# Altium PCB MM6108IQ MotherBoard.PcbDoc
Units mil, origin at the board's own origin, x right, y up, seen from the top; angles counter-clockwise.
Board outline 6000 x 4000 mil, 2 copper layers (Top Layer, Bottom Layer); 73 components, 61 nets, 213 pads, 0 vias.
Unrouted connection lines stored in the file: 137.
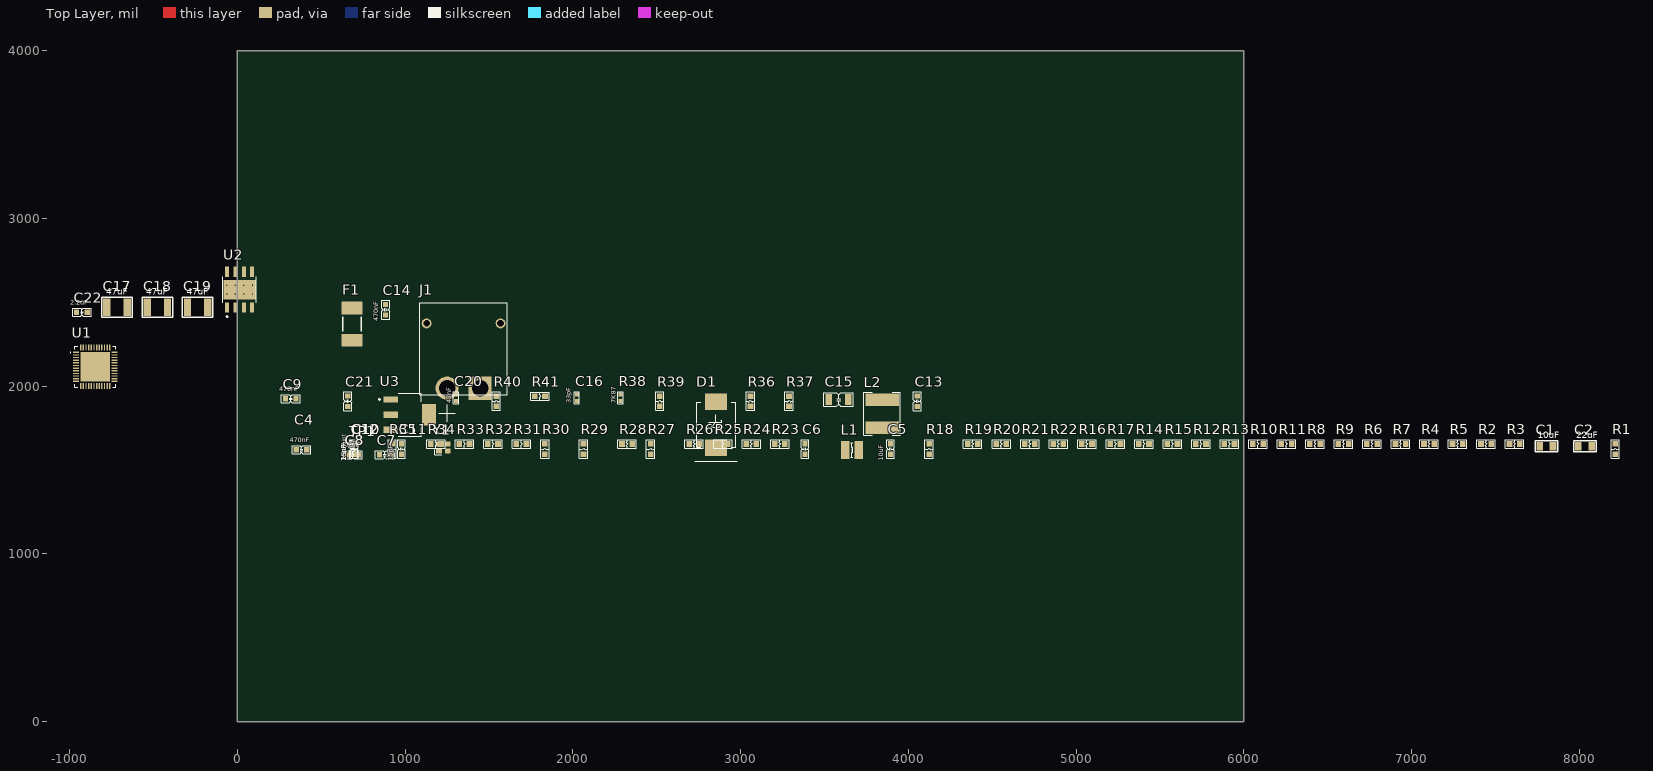
[diagram p0: Top Layer view]
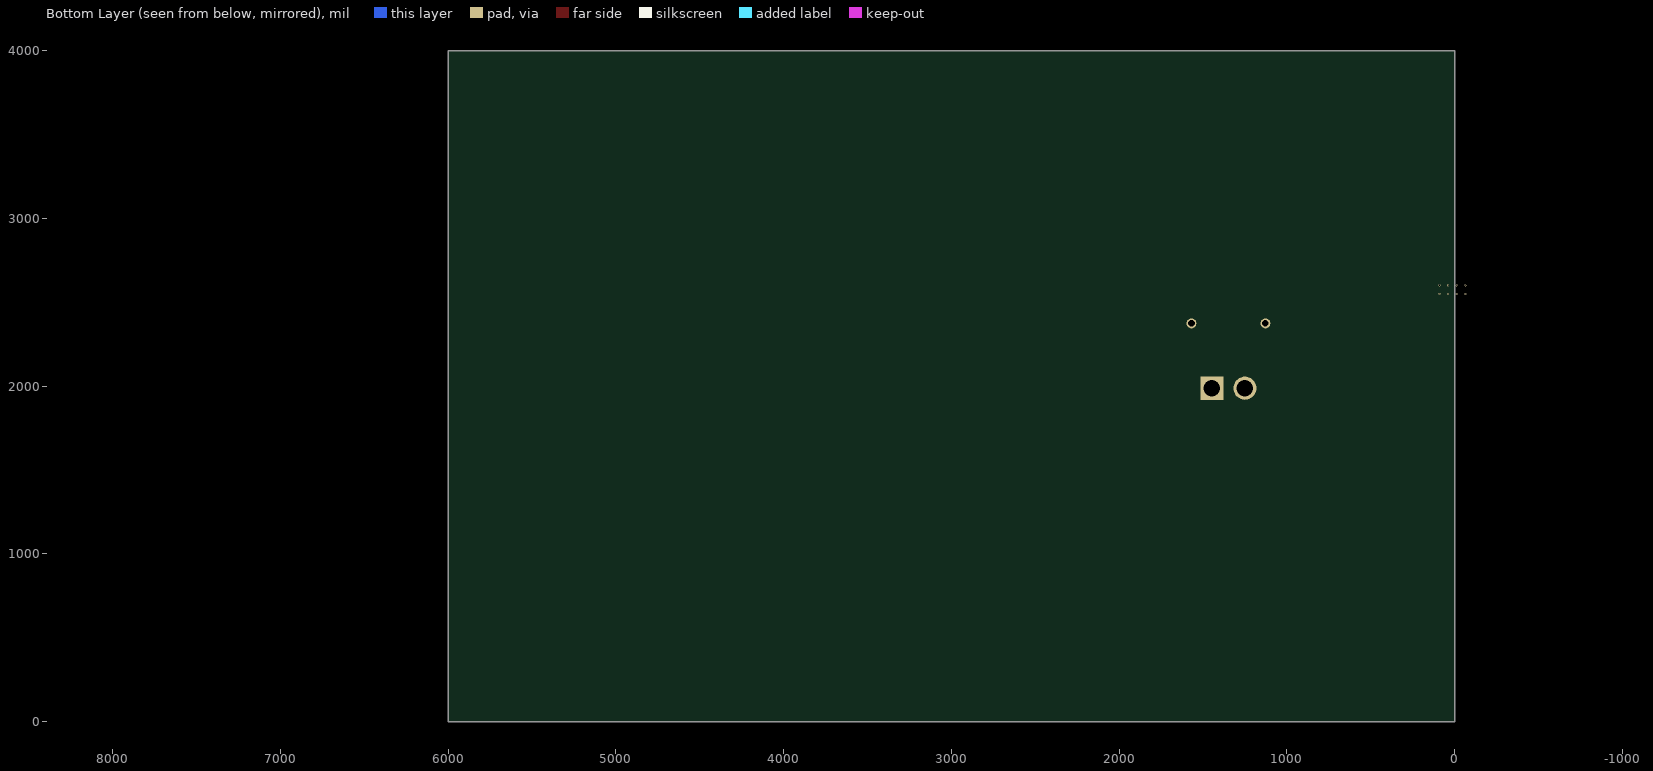
[diagram p1: Bottom Layer view, seen from below]

## Layer stack, top to bottom
Top Solder: solder mask 0.4, Solder Resist, Dk 3.5
Top Layer: signal copper 1.4
Dielectric 1: dielectric 12.6, FR-4, Dk 4.8
Bottom Layer: signal copper 1.4
Bottom Solder: solder mask 0.4, Solder Resist, Dk 3.5

## Board outline
0,0 6000,0 6000,4000 0,4000

## Design rules (kind name [scope] priority, off if disabled: settings)
Clearance [All] p1: gap=10 ignorepadtopadclearanceinfootprint=FALSE
PolygonConnect [All] p1: connectstyle=Relief reliefconductorwidth=10 reliefentries=4 polygonreliefangle="90 Angle" airgapwidth=10
RoutingVias [All] p1: holewidth=28 width=50 viastyle="Through Hole" minholewidth=28 minwidth=50 maxholewidth=28 maxwidth=50
SolderMaskExpansion [All] p1: expansion=0 istentingtop=FALSE
SupplyNets "Schematic Supply Nets_6" [InNet('3V3')] p1: voltage=0.000
SupplyNets "Schematic Supply Nets_5" [InNet('VDDIO3V3')] p2: voltage=0.000
SupplyNets "Schematic Supply Nets_4" [InNet('VBAT3V3')] p3: voltage=0.000
SupplyNets "Schematic Supply Nets_3" [InNet('5V')] p4: voltage=0.000
SupplyNets "Schematic Supply Nets_2" [InNet('GND')] p5: voltage=0.000
SupplyNets "Schematic Supply Nets_1" [InNet('5V_TPS60B')] p6: voltage=0.000
SupplyNets "Schematic Supply Nets" [InNet('12VIN')] p7: voltage=0.000
Width [All] p1: maxlimit=10 minlimit=10 preferedwidth=10
30 further rules are at their usual default settings.

## Classes and differential pairs
net class RF: MM6108IQ_RFIN MM6108IQ_RFOUT
component class "Power Management": C13 C14 C15 C16 C17 C18 C19 C20 C21 C22 D1 F1 J1 L2 R36 R37 R38 R39 R40 R41 U2 U3
component class "MM6108IQ Chip": C1 C2 C3 C4 C5 C6 C7 C8 C9 C10 C11 C12 L1 R1 R2 R3 R4 R5 R6 R7 R8 R9 R10 R11 R12 R13 R14 R15 R16 R17 R18 R19 R20 R21 R22 R23 R24 R25 R26 R27 R28 R29 R30 R31 R32 R33 R34 R35 TP1 U1 Y1

## Components (designator, comment, footprint, x,y, rotation, side; value= is the part's Value field where it differs from the comment)
C1 "10uF" "CAP Ceramic SMD 0805" 7803.82,1640 r0 top
C2 "22uF" "CAP Ceramic SMD 0805" 8033.82,1640 r0 top
C3 "470nF" "CAP Ceramic SMD 0603" 688.82,1590 r0 top
C4 "470nF" "CAP Ceramic SMD 0603" 382.32,1620 r0 top
C5 "10uF" "CAP Ceramic SMD 0603" 3893.82,1625 r90 top
C6 "" "CAP Ceramic SMD 0603" 3383.82,1625 r90 top value=4.7uF
C7 "" "CAP Ceramic SMD 0603" 878.82,1590 r0 top value=4.7uF
C8 "" "CAP Ceramic SMD 0603" 688.82,1590 r0 top value=4.7uF
C9 "470nF" "CAP Ceramic SMD 0603" 318.82,1925 r0 top
C10 "15pF" "CAP Ceramic SMD 0603" 698.82,1625 r90 top
C11 "15pF" "CAP Ceramic SMD 0603" 978.82,1625 r90 top
C12 "2.2uF" "CAP Ceramic SMD 0603" 693.82,1625 r90 top
C13 "" "CAP Ceramic SMD 0603" 4053.82,1910 r90 top value=100nF
C14 "470nF" "CAP Ceramic SMD 0603" 883.82,2455 r90 top
C15 "" "CAP Ceramic SMD 1206" 3583.82,1920 r0 top value=4.7uF
C16 "33pF" "CAP Ceramic SMD 0402" 2023.82,1930 r90 top
C17 "47uF" "CAP Ceramic SMD 1210" -716.18,2470 r0 top
C18 "47uF" "CAP Ceramic SMD 1210" -476.18,2470 r0 top
C19 "47uF" "CAP Ceramic SMD 1210" -236.18,2470 r0 top
C20 "47nF" "CAP Ceramic SMD 0402" 1303.82,1930 r90 top
C21 "" "CAP Ceramic SMD 0603" 658.82,1910 r90 top value=1uF
C22 "2.2uF" "CAP Ceramic SMD 0603" -926.18,2440 r0 top
D1 "B360A-13-F" DO-214AB 2853.82,1770 r90 top
F1 "0452.500MRL" "Fuse SMD 2410 MFG" 683.82,2370 r90 top
J1 "XT30PW-M" XT30PW-M 1348.82,2145 r0 top
L1 "10uF" "IND SMD 1210" 3663.82,1620 r0 top
L2 "15uH" "IND SMD VLS6045EX" 3843.82,1835 r90 top
R1 "=Value" "RES SMD 0603" 8213.82,1625 r90 top
R2 "10k" "RES SMD 0603" 7443.82,1655 r0 top
R3 "10k" "RES SMD 0603" 7613.82,1655 r0 top
R4 "10k" "RES SMD 0603" 7103.82,1655 r0 top
R5 "10k" "RES SMD 0603" 7273.82,1655 r0 top
R6 "10k" "RES SMD 0603" 6763.82,1655 r0 top
R7 "10k" "RES SMD 0603" 6933.82,1655 r0 top
R8 "10k" "RES SMD 0603" 6423.82,1655 r0 top
R9 "10k" "RES SMD 0603" 6593.82,1655 r0 top
R10 "10k" "RES SMD 0603" 6083.82,1655 r0 top
R11 "10k" "RES SMD 0603" 6253.82,1655 r0 top
R12 "10k" "RES SMD 0603" 5743.82,1655 r0 top
R13 "10k" "RES SMD 0603" 5913.82,1655 r0 top
R14 "10k" "RES SMD 0603" 5403.82,1655 r0 top
R15 "10k" "RES SMD 0603" 5573.82,1655 r0 top
R16 "10k" "RES SMD 0603" 5063.82,1655 r0 top
R17 "10k" "RES SMD 0603" 5233.82,1655 r0 top
R18 "47kR" "RES SMD 0603" 4123.82,1625 r90 top value=47k
R19 "47kR" "RES SMD 0603" 4383.82,1655 r0 top value=47k
R20 "47kR" "RES SMD 0603" 4553.82,1655 r0 top value=47k
R21 "47kR" "RES SMD 0603" 4723.82,1655 r0 top value=47k
R22 "47kR" "RES SMD 0603" 4893.82,1655 r0 top value=47k
R23 "0R" "RES SMD 0603" 3233.82,1655 r0 top
R24 "0R" "RES SMD 0603" 3063.82,1655 r0 top
R25 "0R" "RES SMD 0603" 2893.82,1655 r0 top
R26 "0R" "RES SMD 0603" 2723.82,1655 r0 top
R27 "10k" "RES SMD 0603" 2463.82,1625 r90 top
R28 "0R" "RES SMD 0603" 2323.82,1655 r0 top
R29 "0R" "RES SMD 0603" 2063.82,1625 r90 top
R30 "10k" "RES SMD 0603" 1833.82,1625 r90 top
R31 "10k" "RES SMD 0603" 1693.82,1655 r0 top
R32 "10k" "RES SMD 0603" 1523.82,1655 r0 top
R33 "10k" "RES SMD 0603" 1353.82,1655 r0 top
R34 "10k" "RES SMD 0603" 1183.82,1655 r0 top
R35 "100k" "RES SMD 0603" 923.82,1625 r90 top
R36 "562k" "RES SMD 0603" 3058.82,1910 r90 top
R37 "60k4" "RES SMD 0603" 3288.82,1910 r90 top
R38 "7K87" "CAP Ceramic SMD 0402" 2283.82,1930 r90 top
R39 "97K6" "RES SMD 0603" 2518.82,1910 r90 top
R40 "86K6" "RES SMD 0603" 1543.82,1910 r90 top
R41 "11k5" "RES SMD 0603" 1803.82,1940 r0 top
TP1 "TestPoint" "TestPoint Surface 0.8mm" 678.82,1650 r90 top
U1 "MM6108IQ" "QFN48 6x6" -846.18,2115 r0 top
U2 "TPS54560BDDAR" LMR14050 13.82,2575 r90 top
U3 "TLV76133DCYR" SOT-223 1028.82,1830 r0 top
Y1 "32MHz" XTAL_ECS-160-9-37-CKM-TR 1228.82,1635 r0 top

## Footprints (in the part's own frame and the unit in brackets; to place one, negate y for a bottom-side part, rotate by r counter-clockwise, add the part's x,y. Pads: shape width x height; smd on the part's side, far side on the other; paste and mask are expansions set on the pad)
"CAP Ceramic SMD 0402" [mm]
  rect 0.6x0.6 smd mask+0.05: 1(-0.5,0) 2(0.5,0)
  silkscreen extent -0.9,-0.4 0.9,0.4, body extent -0.51,-0.25 0.51,0.25, height 0.51
"CAP Ceramic SMD 0603" [mm]
  rect 0.8x0.8 smd: 1(-0.8,0) 2(0.8,0)
  silkscreen extent -1.41,-0.6 1.41,0.6, body extent -0.8,-0.4 0.8,0.4, height 0.3
"CAP Ceramic SMD 0805" [mm]
  rect 1x1.25 smd: 1(-1.025,0.05) 2(0.975,0.05)
  silkscreen extent -1.73,-0.78 1.68,0.88, body extent -1,-0.52 1,0.73, height 0.78
"CAP Ceramic SMD 1206" [mm]
  rect 1x1.6 smd: 1(-1.5,0) 2(1.5,0)
  silkscreen extent -2.25,-1.02 2.25,1.05, body extent -1.6,-0.8 1.6,0.8, height 1
"CAP Ceramic SMD 1210" [mm]
  rect 1.1x2.6 smd: 1(-1.55,0) 2(1.55,0)
  silkscreen extent -2.3,-1.5 2.3,1.5, body extent -2,-1.24 2,1.24, height 1.7
DO-214AB [mm]
  rect 2.5x3.3 smd: 1(-3.485,0) 2(3.485,0)
  silkscreen extent -5.5,-3.2 3.43,3.2, body extent -3.97,-2.95 3.97,2.95, height 2.62
"Fuse SMD 2410 MFG" [mm]
  rect 1.96x3.15 smd paste+0 mask+0: 1(-2.455,0) 2(2.455,0)
  silkscreen extent -1.1,-1.4 1.1,1.4, body extent -3.53,-1.68 3.53,1.68, height 0.25
"IND SMD 1210" [mm]
  rect 1.25x2.7 smd: 1(-1.025,0) 2(1.025,0)
  silkscreen extent -0.15,-1.1 0.15,1.1, body extent -1.6,-1.25 1.6,1.25, height 1.01
"IND SMD VLS6045EX" [mm]
  rect 1.9x5.1 smd: 1(-2.1,0) 2(2.1,0)
  silkscreen extent -3.25,-2.75 3.25,2.75, body extent -3,-3 3,3, height 4.51
LMR14050 [mm]
  rrect5% 1.55x0.6 smd mask+0: 1(-2.7,1.905) 2(-2.7,0.635) 3(-2.7,-0.635) 4(-2.7,-1.905) 5(2.7,-1.905) 6(2.7,-0.635) 7(2.7,0.635) 8(2.7,1.905)
  round 0.3 hole 0.2: 9(-0.65,1.95) 9(-0.65,-0.65) 9(-0.65,0.65) 9(-0.65,-1.95) 9(0.65,1.95) 9(0.65,-0.65) 9(0.65,0.65) 9(0.65,-1.95)
  rect 2.95x4.9 smd paste-3 mask+0: 9(0,0)
  silkscreen extent -4.17,-2.52 1.95,2.52, body extent -3,-2.45 3,2.45, height 1.7
"QFN48 6x6" [mm]
  rect 0.9x0.2 smd: 1(-2.9,2.2) 2(-2.9,1.8) 3(-2.9,1.4) 4(-2.9,1) 5(-2.9,0.6) 6(-2.9,0.2) 7(-2.9,-0.2) 8(-2.9,-0.6) 9(-2.9,-1) 10(-2.9,-1.4) 11(-2.9,-1.8) 12(-2.9,-2.2) 25(2.9,-2.2) 26(2.9,-1.8) 27(2.9,-1.4) 28(2.9,-1) 29(2.9,-0.6) 30(2.9,-0.2) 31(2.9,0.2) 32(2.9,0.6) 33(2.9,1) 34(2.9,1.4) 35(2.9,1.8) 36(2.9,2.2)
  rect 0.2x0.9 smd: 13(-2.2,-2.9) 14(-1.8,-2.9) 15(-1.4,-2.9) 16(-1,-2.9) 17(-0.6,-2.9) 18(-0.2,-2.9) 19(0.2,-2.9) 20(0.6,-2.9) 21(1,-2.9) 22(1.4,-2.9) 23(1.8,-2.9) 24(2.2,-2.9) 37(2.2,2.9) 38(1.8,2.9) 39(1.4,2.9) 40(1,2.9) 41(0.6,2.9) 42(0.2,2.9) 43(-0.2,2.9) 44(-0.6,2.9) 45(-1,2.9) 46(-1.4,2.9) 47(-1.8,2.9) 48(-2.2,2.9)
  rect 4.5x4.5 smd: 49(0,0)
  silkscreen extent -3.79,-3.12 3.12,3.12, body extent -3,-3 3,3, height 0.89
"RES SMD 0603" [mm]
  rect 0.85x0.85 smd: 1(-0.775,0) 2(0.775,0)
  silkscreen extent -1.4,-0.63 1.4,0.63, body extent -0.8,-0.4 0.8,0.4, height 0.44
SOT-223 [mm]
  rect 2.15x0.95 smd mask+0.05: 1(-2.9,2.3) 2(-2.9,0) 3(-2.9,-2.3)
  rect 2.15x3.25 smd mask+0.05: 4(2.9,0)
  silkscreen extent -4.7,-3.25 1.75,3.25, body extent -3.5,-3.25 3.5,3.25, height 1.8
"TestPoint Surface 0.8mm" [mm]
  round 0.8 smd mask+0.05: 1(0,0)
  silkscreen extent -0.52,-0.52 0.52,0.52
XT30PW-M [mm]
  round 3.5 hole 2.5: 1(-2.5,-4)
  rect 3.5x3.5 hole 2.5: 2(2.5,-4)
  round 1.5 hole 1: S1(5.6,5.818) S2(-5.6,5.818)
  silkscreen extent -6.65,-9.07 6.65,8.97, body extent -6.65,-5.05 6.65,8.9, height 5.5
XTAL_ECS-160-9-37-CKM-TR [mm]
  rect 0.85x0.75 smd: 1(-0.675,-0.525) 2(0.675,-0.525) 3(0.675,0.525) 4(-0.675,0.525)
  silkscreen extent -1.35,-1.13 -0.25,-0.38, body extent -1,-0.8 1,0.8, height 0.5

## Part data
C1: library part "CAP 0805 10uF 25V 10%", "CAP CER 10uF 25V X7R 0805", Manufacturer="Samsung Electro-Mechanics", Manufacturer Part Number=CL21B106KAYQNNE, Supplier Part Number=C3039694, Tolerance=10%, Voltage=25V, Capacitance=10uF, Category="Ceramic Capacitors", Mount="Surface Mount", RoHS=Yes, Supplier=LCSC
C2: library part "CAP 0805 22uF 10V", "CAP CER 22uF 10V X7R 0805", Case Code (Imperial)=0805, Case Code (Metric)=3216, Dielectric=X7R, Manufacturer=muRata, Manufacturer Part Number=GRM21BZ71A226ME15L, Max Operating Temperature=125°C, Min Operating Temperature=-55°C, Package Quantity=1, Supplier Part Number=C907991, Tolerance=20%, Voltage=10V, Capacitance=22uF, Case/Package=0805, Category="Ceramic Capacitors", Construction=Flat, Depth=1.6mm, Height=1.6mm, Length=3.2mm, Mount="Surface Mount", Packaging="Tape and Reel", Pricing 1="20=0.033200, 200=0.025500, 600=0.022100, 2000=0.019600, 10000=0.018600, 20000=0.017900 (AUD)", Radiation Hardening=No, RoHS=Yes, RoHS Compliant=Yes, Series=CL, Stock 1=663420, Supplier=LCSC, Thickness=0.071inch, Voltage Rating=10V, Width=0.063inch
C3 C4 C9 C14: library part "CAP 0603 470nF 25V", "470nF ±10% 25V Ceramic Capacitor X7R 0603", Case Code (Imperial)=0603, Case Code (Metric)=1608, Dielectric=X7R, Dielectric Material=Ceramic, Insulation Resistance=10GR, Manufacturer="Samsung Electro-Mechanics", Manufacturer Part Number=CL10B474KA8NNNC, Max Operating Temperature=125°C, Min Operating Temperature=-55°C, Package Quantity=1, Supplier Part Number=C1623, Tolerance=10%, Voltage=50V, Capacitance=470nF, Case/Package=0603, Category="Ceramic Capacitors", Depth=0.8mm, Dissipation Factor=2.5%, Halogen Free="Halogen Free", Height=0.8mm, Lead Free="Lead Free", Length=1.6mm, Material=Ceramic, Mount="Surface Mount", Number of Pins=2, Packaging="Tape and Reel", Radiation Hardening=No, Resistor Type=Ceramic, RoHS Compliant=Yes, Series=CC, Supplier=LCSC, Termination=SMD/SMT, Thickness=0.035inch, Voltage Rating=50V, Voltage Rating (DC)=50V, Width=0.031inch
C5: library part "CAP 0603 10uF 35V", "Cap Ceramic 10uF 35V X5R 20% Pad SMD 0603 85C T/R", Case Code (Imperial)=0603, Case Code (Metric)=1608, Dielectric=X5R, Manufacturer=Murata, Manufacturer Part Number=GRM188R6YA106MA73D, Max Operating Temperature=85°C, Min Operating Temperature=-55°C, Supplier Part Number=C194427, Tolerance=20%, Voltage=35V, Capacitance=10uF, Case/Package=0603, Category="Ceramic Capacitors", ComponentLink1Description=http://search.murata.co.jp/Ceramy/image/img/A01X/G101/ENG/GRM188R6YA106MA73-01.pdf?src-supplier=Future+Electronics, ComponentLink1URL=http://search.murata.co.jp/Ceramy/image/img/A01X/G101/ENG/GRM188R6YA106MA73-01.pdf?src-supplier=Future+Electronics, ComponentLink2Description=http://search.murata.co.jp/Ceramy/image/img/A01X/G101/ENG/GRM188R6YA106MA73-01.pdf?src-supplier=Digi-Key, ComponentLink2URL=http://search.murata.co.jp/Ceramy/image/img/A01X/G101/ENG/GRM188R6YA106MA73-01.pdf?src-supplier=Digi-Key, ComponentLink3Description=https://www.murata.com/~/media/webrenewal/support/library/catalog/products/capacitor/mlcc/c02e.ashx?la=en-us&src-supplier=Digi-Key, ComponentLink3URL=https://www.murata.com/~/media/webrenewal/support/library/catalog/products/capacitor/mlcc/c02e.ashx?la=en-us&src-supplier=Digi-Key, ComponentLink4Description=http://search.murata.co.jp/Ceramy/image/img/A01X/G101/ENG/GRM188R6YA106MA73-01.pdf?src-supplier=Mouser, ComponentLink4URL=http://search.murata.co.jp/Ceramy/image/img/A01X/G101/ENG/GRM188R6YA106MA73-01.pdf?src-supplier=Mouser, ComponentLink5Description=http://search.murata.co.jp/Ceramy/image/img/A01X/G101/ENG/GRM188R6YA106MA73-01.pdf?src-supplier=TTI, ComponentLink5URL=http://search.murata.co.jp/Ceramy/image/img/A01X/G101/ENG/GRM188R6YA106MA73-01.pdf?src-supplier=TTI, Length=0.063inch, Mount="Surface Mount", Packaging="Tape and Reel", RoHS=Yes, RoHS Compliant=Yes, Supplier=LCSC, Thickness=0.039inch, Voltage Rating=35V, Voltage Rating (DC)=35V, Width=0.031inch
C6 C7 C8: library part "CAP 0603 4.7uF 25V X5R 10%", "25V 4.7uF X5R ±10% 0603 Multilayer Ceramic Capacitors MLCC - SMD/SMT ROHS", Manufacturer="Samsung Electro-Mechanics", Manufacturer Part Number=CL10A475KA8NQNC, Supplier Part Number=C69335, Temperature Characteristics Code=X5R, Voltage=35V, Supplier=LCSC
C10 C11: library part "CAP 0603 15pF 50V NP0 5%", "50V 15pF NP0 ±5% 0603 Multilayer Ceramic Capacitors MLCC - SMD/SMT ROHS", Manufacturer=Yageo, Manufacturer Part Number=CC0603JRNPO9BN150, Supplier Part Number=C107037, Voltage=50V, Supplier=LCSC
C12 C22: library part "CAP 0603 2.2uF 16V", "16V 2.2uF X5R ±10% 0603 Multilayer Ceramic Capacitors MLCC - SMD/SMT ROHS", Manufacturer=YAGEO, Manufacturer Part Number=CC0603KRX5R7BB225, Supplier Part Number=C106853, Voltage=16V, Capacitance=2.2uF, Supplier=LCSC
C13: library part "CAP 0603 100nF 100V X7R 10%", "100V 100nF X7R ±10% 0603 Multilayer Ceramic Capacitors MLCC - SMD/SMT ROHS", Manufacturer=Yageo, Manufacturer Part Number=CC0603KRX7R0BB104, Supplier Part Number=C113803, Temperature Characteristics Code=X7R, Voltage=100V, Supplier=LCSC
C15: library part "CAP 1206 4.7uF 50V X7R", "CAP CER 4.7uF 50V X7R 1206", Manufacturer="Samsung Electro-Mechanics", Manufacturer Part Number=CL31B475KBHNNNE, Supplier Part Number=C51205, Voltage=50V, Supplier=LCSC
C16: library part "CAP 0402 33pF 50V C0G", "CAP CER 33pF 50V C0G 0402", Manufacturer="Samsung Electro-Mechanics", Manufacturer Part Number=GRM155R71E473KA88D, Supplier Part Number=C70465, Voltage=50V, Capacitance=33pF, Supplier=LCSC
C17 C18 C19: library part "CAP 1210 47uF 10V X7R", "47uF ±10% 10V Ceramic Capacitor X7R 1210", Case/Package=1210, Manufacturer=muRata, Manufacturer Part Number=GRM32ER71A476KE15L, Supplier Part Number=C84494, Temperature Characteristics Code=X7R, Voltage Rating=10V, Supplier=LCSC
C20: library part "CAP 0402 47nF 25V", "CAP CER 47nF 25V X7R 0402", Case Code (Imperial)=0603, Case Code (Metric)=1608, Case/Package=0402, Dielectric=X7R, Dielectric Material=Ceramic, Insulation Resistance=10GR, Manufacturer=muRata, Manufacturer Part Number=GRM155R71E473KA88D, Max Operating Temperature=125°C, Min Operating Temperature=-55°C, Package Quantity=1, Supplier Part Number=C77017, Tolerance=10%, Voltage=25V, Capacitance=47nF, Category="Ceramic Capacitors", Depth=0.8mm, Dissipation Factor=2.5%, Halogen Free="Halogen Free", Height=0.8mm, Lead Free="Lead Free", Length=1.6mm, Material=Ceramic, Mount="Surface Mount", Number of Pins=2, Packaging="Tape and Reel", Radiation Hardening=No, Resistor Type=Ceramic, RoHS Compliant=Yes, Series=CC, Supplier=LCSC, Termination=SMD/SMT, Thickness=0.035inch, Voltage Rating=25V, Voltage Rating (DC)=25V, Width=0.031inch
C21: library part "CAP 0603 1uF 50V X7R 10%", "50V 1uF X7R ±10% 0603 Multilayer Ceramic Capacitors MLCC - SMD/SMT ROHS", Manufacturer=YAGEO, Manufacturer Part Number=CC0603KRX7R9BB105, Supplier Part Number=C559769, Temperature Characteristics Code=X7R, Voltage=50V, Supplier=LCSC
D1: library part "DIODES B560C-13-F", "Voltage： 60V Current： 5A", Manufacturer=DIODES, Manufacturer Part Number=B560C-13-F, Supplier Part Number=C85100, Supplier=LCSC
F1: library part "Littelfuse 0452.500MRL", "FUSE BRD MNT 500mA 125VAC/VDC 2410", Manufacturer=Littelfuse, Supplier Part Number=C151120, Manufacturer Part Number=0452.500MRL, Supplier=LCSC
J1: "Power Connectors ROHS", Manufacturer="Changzhou Amass Elec", Manufacturer Part Number=XT30PW-M30.G.Y, Supplier Part Number=C431092, Supplier=LCSC
L1: library part "IND 1210 10uF 20% 2.2A", "FIXED IND 10uH 2.2A 210mΩ 1210", Manufacturer=XR, Manufacturer Part Number=XRTC322512S100MBCA, Supplier Part Number=C39846661, Supplier=LCSC
L2: library part "IND 6X6mm 15uF 20%_1", "FIXED IND 15uH 2.5A 75mΩ SMD,6x6mm", Manufacturer=TDK, Manufacturer Part Number=VLS6045EX-150M, Suppleir Part Number=C404502, Supplier=LCSC
R1 R2 R3 R4 R5 R6 R7 R8 R9 R10 R11 R12 R13 R14 R15 R16 R17 R27 R30 R31 R32 R33 R34: library part "RES 0603 10k 1%", "100mW Thick Film Resistors 75V ±100ppm/℃ ±1% 10kΩ 0603 Chip Resistor - Surface Mount ROHS", Manufacturer=YAGEO, Manufacturer Part Number=RC0603FR-0710KL, Supplier Part Number=C98220, Supplier=LCSC
R18 R19 R20 R21 R22: library part "RES 0603 47k 1%", "Res Thick Film 0603 47K Ohm 1% 1/10W ±100ppm/°C Molded SMD Punched Carrier T/R", Case Code (Imperial)=0603, Case Code (Metric)=1608, Manufacturer=YAGEO, Manufacturer Part Number=RC0603FR-0747KL, Max Operating Temperature=155°C, Max Power Dissipation=100mW, Min Operating Temperature=-55°C, Package Quantity=5000, Resistance Tolerance=1%, Resistor Type="Thick Film", Supplier Part Number=C105579, Temperature Coefficient=100ppm/°C, Voltage Rating=75V, Working Voltage=6V, Case/Package=0603, Category="Chip SMD Resistors", ComponentLink1Description=https://datasheet.ciiva.com/6138/aoa0000ce2-6138149.pdf?src-supplier=Farnell, ComponentLink1URL=https://datasheet.ciiva.com/6138/aoa0000ce2-6138149.pdf?src-supplier=Farnell, ComponentLink2Description=https://datasheet.ciiva.com/7802/aoa0000ce2-7802421.pdf?src-supplier=Element14, ComponentLink2URL=https://datasheet.ciiva.com/7802/aoa0000ce2-7802421.pdf?src-supplier=Element14, ComponentLink3Description=https://datasheet.ciiva.com/46398/1678782-46398088.pdf?src-supplier=Element14, ComponentLink3URL=https://datasheet.ciiva.com/46398/1678782-46398088.pdf?src-supplier=Element14, ComponentLink4Description=https://datasheet.ciiva.com/22722/426256-22722781.pdf?src-supplier=Element14, ComponentLink4URL=https://datasheet.ciiva.com/22722/426256-22722781.pdf?src-supplier=Element14, ComponentLink5Description=https://datasheet.ciiva.com/46398/1678782-46398089.pdf?src-supplier=Element14, ComponentLink5URL=https://datasheet.ciiva.com/46398/1678782-46398089.pdf?src-supplier=Element14, ComponentLink6Description=https://datasheet.ciiva.com/24069/aoa0000ce2-24069209.pdf?src-supplier=Mouser, ComponentLink6URL=https://datasheet.ciiva.com/24069/aoa0000ce2-24069209.pdf?src-supplier=Mouser, ComponentLink7Description=https://datasheet.ciiva.com/16758/70260748-16758831.pdf?src-supplier=Allied+Electronics, ComponentLink7URL=https://datasheet.ciiva.com/16758/70260748-16758831.pdf?src-supplier=Allied+Electronics, ComponentLink8Description=https://datasheet.ciiva.com/48531/aoa0000ce2-48531029.pdf?src-supplier=Avnet, ComponentLink8URL=https://datasheet.ciiva.com/48531/aoa0000ce2-48531029.pdf?src-supplier=Avnet, ComponentLink9Description=https://datasheet.ciiva.com/30236/aoa0000ce2-30236698.pdf?src-supplier=Onlinecomponents.com, ComponentLink9URL=https://datasheet.ciiva.com/30236/aoa0000ce2-30236698.pdf?src-supplier=Onlinecomponents.com, Construction=Rectangular, Contact Plating=Tin, Depth=0.8mm, Features="Automotive AEC-Q200", Height=0.45mm, Lead Free="Lead Free", Length=1.6mm, Military Standard=Not, Mount="Surface Mount", Number of Pins=2, Number of Terminations=2, Packaging="Tape and Reel", Power Rating=100mW, Pricing 1="50=0.011700, 500=0.009700, 1500=0.008600, 5000=0.008000, 25000=0.007400, 50000=0.007100 (AUD)", Radiation Hardening=No, REACH SVHC="No SVHC", Resistance=47kR, RoHS=Yes, RoHS Compliant=Yes, Series=ERJ, Stock 1=88700, Supplier=LCSC, Technology="THICK FILM", Termination=SMD/SMT, Tolerance=1%, Voltage Rating (DC)=75V, Width=0.8mm
R23 R24 R25 R26 R28 R29: library part "RES 0603 0R 1%", "100mW Thick Film Resistors 75V ±5% 0Ω 0603 Chip Resistor - Surface Mount ROHS", Manufacturer=YAGEO, Manufacturer Part Number=RC0603JR-070RL, Supplier Part Number=C95177, Supplier=LCSC
R35: library part "RES 0603 100k 1%", "100mW Thick Film Resistors 75V ±100ppm/℃ ±1% 100kΩ 0603 Chip Resistor - Surface Mount ROHS", Manufacturer=YAGEO, Manufacturer Part Number=RC0603FR-07100KL, Supplier Part Number=C14675, Supplier=LCSC
R36: library part "RES 0603 562k 1%", "100mW 562kΩ 75V Thick Film Resistor ±100ppm/℃ ±1% 0603 Chip Resistor - Surface Mount RoHS", Manufacturer=YAGEO, Manufacturer Part Number=RC0603FR-07562KL, Supplier Part Number=C185319, Supplier=LCSC
R37: library part "RES 0603 60k4 1%", "RES 60.4kΩ ±1% 100mW 0603", Case Code (Imperial)=0603, Case Code (Metric)=1608, Manufacturer=Yageo, Manufacturer Part Number=RC0603FR-0760K4L, Max Operating Temperature=155°C, Max Power Dissipation=100mW, Min Operating Temperature=-55°C, Package Quantity=1, Resistance Tolerance=1%, Resistor Type="Thick Film", Supplier Part Number=C165742, Temperature Coefficient=100ppm/°C, Voltage Rating=50V, Case/Package=0603, Category="Chip SMD Resistors", Construction=Rectangular, Depth=0.8mm, Features="Moisture Resistant", Height=0.45mm, Lead Free="Lead Free", Length=1.6mm, Military Standard=Not, Number of Pins=2, Number of Terminations=2, Packaging="Tape and Reel", Power Rating=100mW, Pricing="100=0.0013 (USD)", Resistance=60k4, RoHS=Yes, RoHS Compliant=Yes, Series=RC, Size Code=0603, Stock=51500, Supplier=LCSC, Technology="THICK FILM", Termination=SMD/SMT, Tolerance=1%, Voltage Rating (DC)=50V, Width=0.8mm
R38: library part "RES 0402 7k87 1%", "RES 7.87kΩ ±1% 62.5mW 0402", Manufacturer=YAGEO, Manufacturer Part Number=RC0402FR-077K87L, Max Power Dissipation=100mW, Package Quantity=1, Resistance Tolerance=1%, Supplier Part Number=C185394, Construction=Rectangular, Contact Plating=Tin, Features="Automotive AEC-Q200", Lead Free="Lead Free", Number of Terminations=2, Pricing 2="50=0.009200, 500=0.007300, 1500=0.006200, 5000=0.005500, 25000=0.005000, 50000=0.004700 (AUD)", Radiation Hardening=No, Resistance=7K87, Series=ERJ, Stock 2=800, Supplier=LCSC, Technology="THICK FILM", Tolerance=1%, Width=0.031inch
R39: library part "RES 0603 97k6 1%", "97.6kΩ 100mW 75V Thick Film Resistor ±100ppm/℃ ±1% 0603 Chip Resistor - Surface Mount RoHS", Manufacturer=YAGEO, Manufacturer Part Number=AC0603FR-0797K6L, Supplier Part Number=C228109, Supplier=LCSC
R40: library part "RES 0603 86k6 1%", "RES 86.6kΩ ±1% 100mW 0603", Manufacturer=YAGEO, Manufacturer Part Number=RC0603FR-0786K6L, Supplier Part Number=C141683, Resistance=86K6, Supplier=LCSC
R41: library part "RES 0603 11k5 1%", "RES 11.5kΩ ±1% 100mW 0603", Manufacturer=YAGEO, Manufacturer Part Number=RC0603FR-0711K5L, Supplier Part Number=C137802, Resistance=11k5, Supplier=LCSC
U1: "Wi-Fi HaLow (pronounced HEYlow) is the first global Wi-Fi standard (IEEE 802.11ah) tailored to meet the / Internet of Things (IoT) needs. It’s an open standard wireless network technology operating in the sub-1 GHz / license-exempt RF bands (850-950 MHz range)", Manufacturer="Morse Micro", Manufacturer Part Number=MM6108IQ
U2: "4.5V to 60V input, 5A step-down DC/DC converter", Manufacturer=TI, Supplier Part Number=C1850354, Manufacturer Part Number=TPS54560BDDAR, Supplier=LCSC
U3: "3V3 Linear Voltage Regulator IC Positive Fixed 1 Output 1A SOT-223", Manufacturer=TI, Supplier Part Number=C7527500, Manufacturer Part Number=TLV76133DCYR, Supplier=LCSC
Y1: library part ECS-320-8-37B-CKY-TR, "CRYSTAL 32MHz 8pF SMD", Manufacturer=ECS, Supplier Part Number=C2636238, Manufacturer Part Number=ECS-320-8-37B-CKY-TR, Supplier=LCSC

## Nets (pads, with @x,y where several pads share a name; then routed paths per layer and width w, separated by ;. In a path a pad name is that pad's centre, name@x,y a point inside that pad or via, vN(x,y) a via of type N, cw(c..) or ccw(c..) an arc to the next point about the centre after c; other vN are vias at no path point)
3V3: C22.1 U3.2
5V: C21.1 U3.3
5V_TPS60B: C17.1 C18.1 C19.1 L2.1 R37.2
12VIN: C14.1 C15.1 F1.2 R36.2 U2.2
12VIN_Fuse: F1.1 J1.1
GND: C1.2 C2.2 C3.2 C4.1 C5.1 C6.2 C7.2 C8.2 C9.2 C10.2 C11.2 C12.2 C14.2 C15.2 C16.2 C17.2 C18.2 C19.2 C20.2 C21.2 C22.2 D1.1 J1.2 R2.1 R3.1 R4.1 R5.1 R6.1 R7.1 R8.1 R9.1 R10.1 R11.1 R12.1 R13.1 R14.1 R15.1 R16.1 R17.1 R30.1 R31.1 R32.1 R33.1 R34.1 R39.1 R40.1 R41.1 U1.1 U1.2 U1.4 U1.6 U1.49 U2.7 U2.9 U3.1 Y1.2 Y1.4
MM6_GPIO0/BUSY: R3.2 U1.17
MM6_GPIO1: R5.2 U1.18
MM6_GPIO2: R7.2 U1.19
MM6_GPIO3: R9.2 U1.20
MM6_GPIO4: R11.2 U1.21
MM6_GPIO5: R13.2 U1.22
MM6_GPIO6: R15.2 U1.23
MM6_GPIO7: R17.2 U1.32
MM6_GPIO8: R2.2 U1.33
MM6_GPIO9: R4.2 U1.34
MM6_GPIO10: R6.2 U1.35
MM6_GPIO11: R8.2 U1.36
MM6_GPIO12: R10.2 U1.37
MM6_GPIO13: R12.2 U1.38
MM6_GPIO14: R14.2 U1.39
MM6_GPIO15: R16.2 U1.40
MM6_JTAG_RST: R30.2 U1.44
MM6_JTAG_TCK: R34.2 U1.45
MM6_JTAG_TDI: R32.2 U1.43
MM6_JTAG_TDO: R31.2 U1.41
MM6_JTAG_TMS: R33.2 U1.42
MM6_SDIO_CLK: R23.1
MM6_SDIO_CMD: R22.1 R24.1
MM6_SDIO_D0: R21.1 R25.1
MM6_SDIO_D1: R20.1 R26.1
MM6_SDIO_D2: R19.1 R28.1
MM6_SDIO_D3: R18.1 R29.1
MM6108IQ_BuckFB: C5.2 C6.1 L1.2 U1.13 U1.14
MM6108IQ_IND: L1.1 U1.12
MM6108IQ_RFIN: U1.5
MM6108IQ_RFOUT: U1.7
MM6108IQ_RST: C12.1 R35.1 U1.10
MM6108IQ_WAKE: U1.9
MM6108IQ_XON: C10.1 U1.46 Y1.1
MM6108IQ_XOP: C11.1 U1.47 Y1.3
NetC7_1: C7.1 U1.8
NetC8_1: C8.1 U1.16
NetC9_1: C9.1 U1.48
NetC13_1: C13.1 U2.1
NetC13_2: C13.2 D1.2 L2.2 U2.8
NetC16_1: C16.1 R38.2 U2.6
NetC20_1: C20.1 R38.1
NetR23_2: R23.2 U1.31
NetR24_2: R24.2 U1.30
NetR25_2: R25.2 U1.29
NetR26_2: R26.2 U1.27
NetR27_1: R27.1 U1.28
NetR28_2: R28.2 U1.26
NetR29_2: R29.2 U1.25
NetR37_1: R37.1 R41.2 U2.5
NetR39_2: R39.2 U2.4
NetTP1_1: TP1.1 U1.3
TPS54560B_EN: R36.1 R40.2 U2.3
VBAT3V3: C1.1 C2.1 C3.1 R35.2 U1.11 U1.15
VDDIO3V3: C4.2 R18.2 R19.2 R20.2 R21.2 R22.2 R27.2 U1.24
pads on no net: J1.S1 J1.S2 R1.1 R1.2 U3.4